# Altium PCB PWR.PcbDoc
Units mm, origin at the board's own origin, x right, y up, seen from the top; angles counter-clockwise.
Board outline 90 x 47 mm, 2 copper layers (Top Layer, Bottom Layer); 44 components, 29 nets, 136 pads, 6 vias.
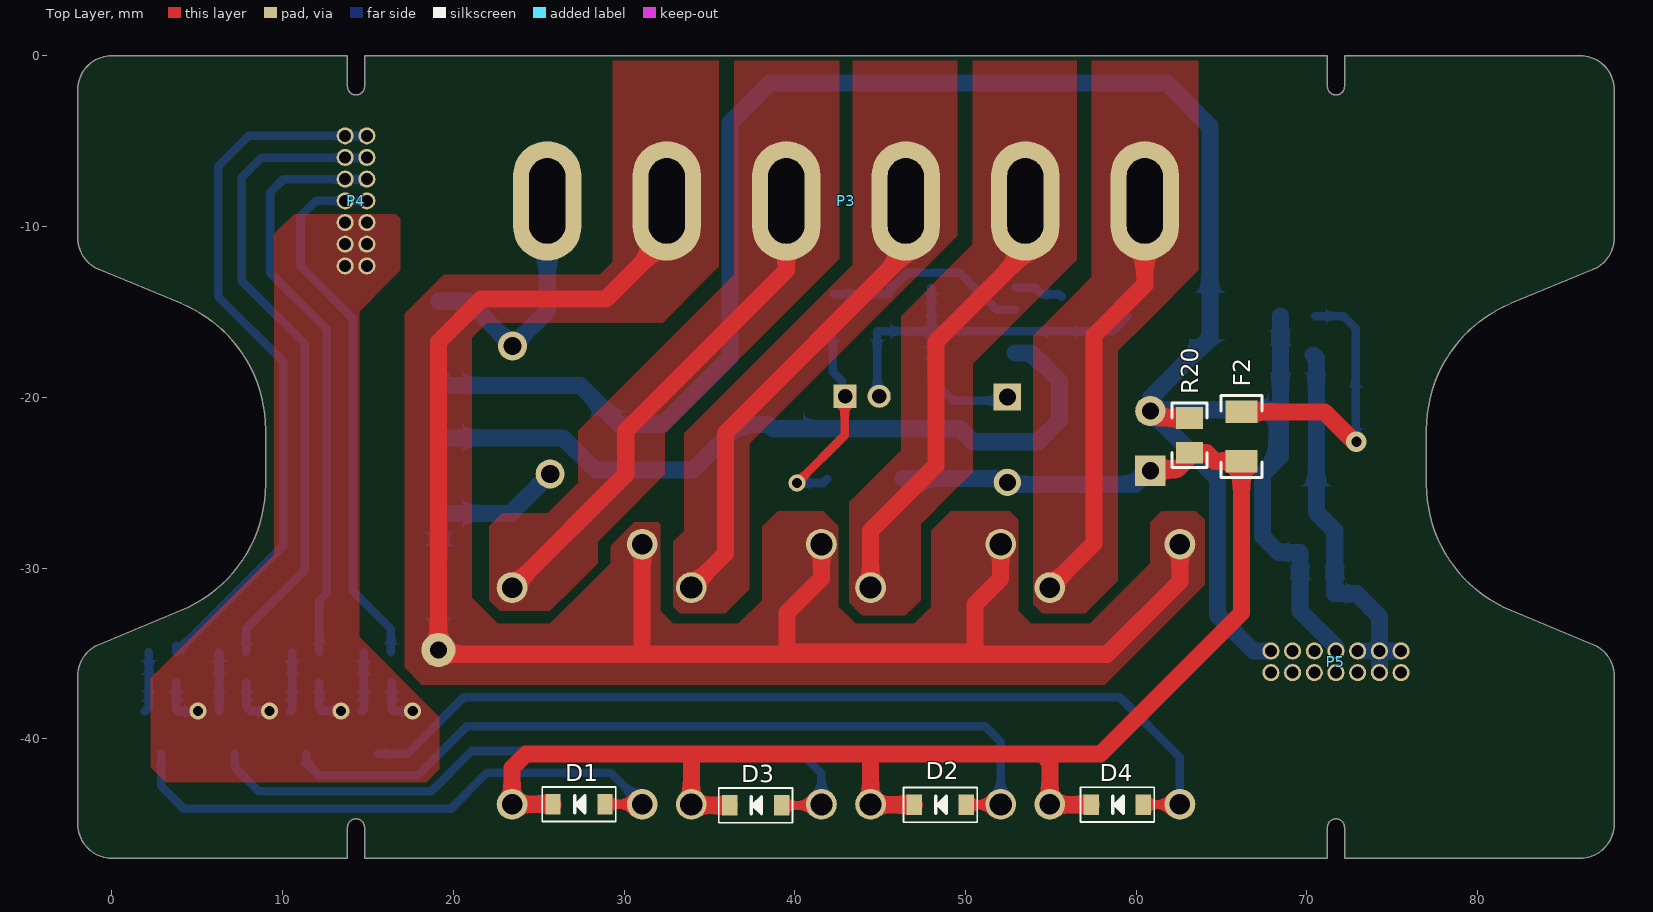
[diagram p0: Top Layer view]
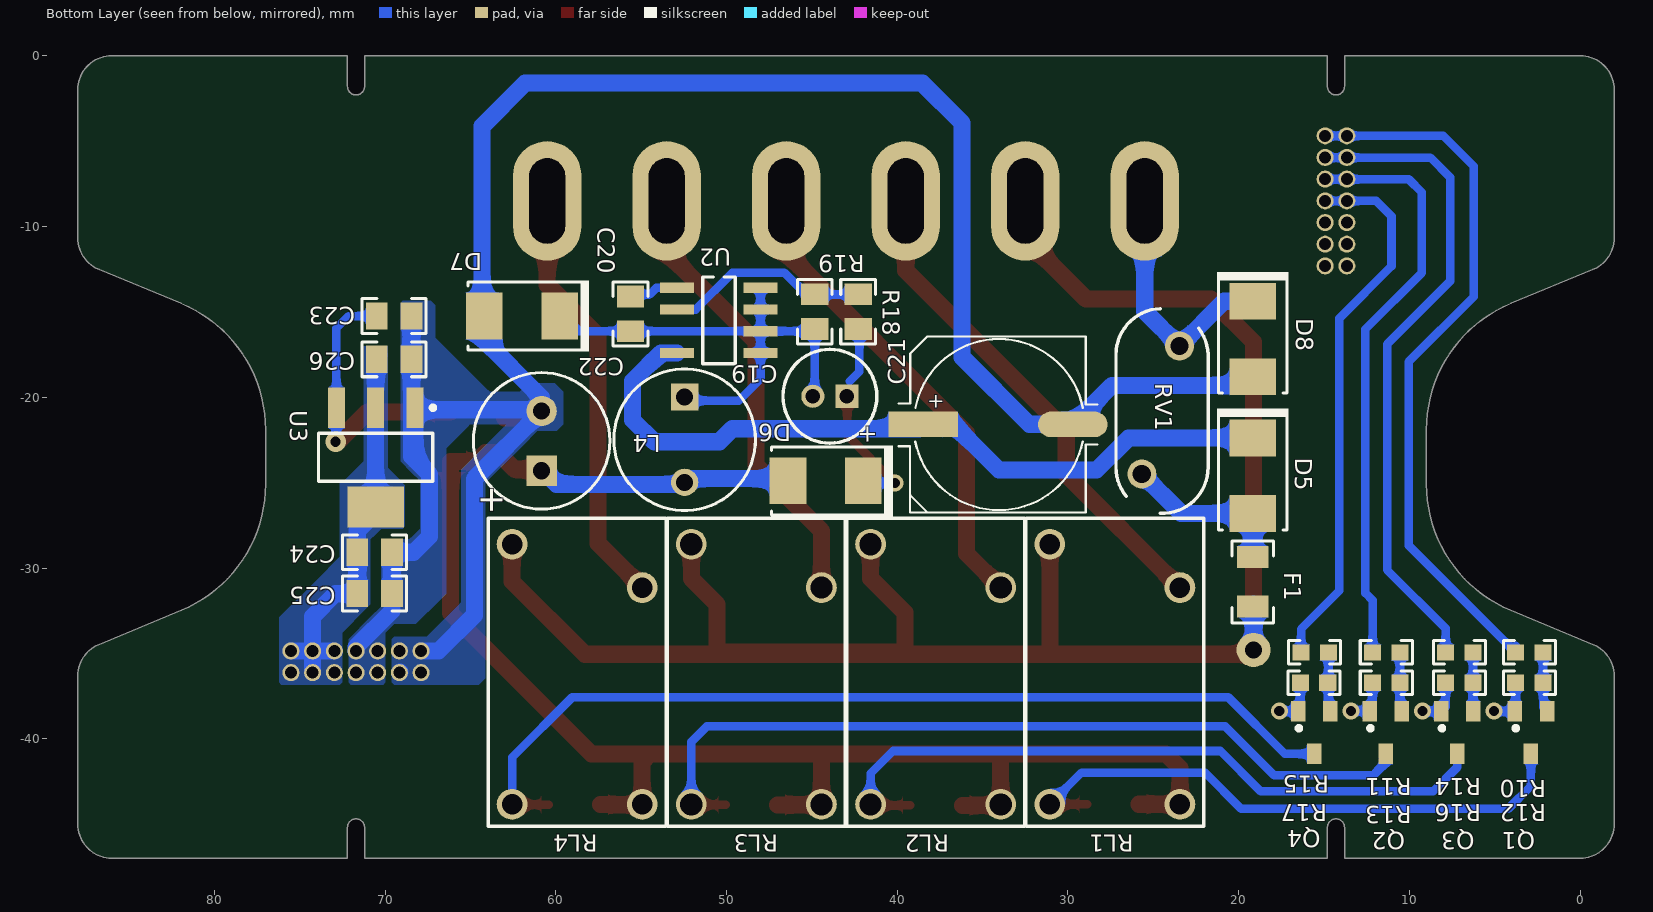
[diagram p1: Bottom Layer view, seen from below]

## Layer stack, top to bottom
Top Solder: solder mask 0.0102, Solder Resist, Dk 3.5
Top Layer: signal copper 0.0356
Dielectric 1: dielectric 0.32, FR-4, Dk 4.8
Bottom Layer: signal copper 0.0356
Bottom Solder: solder mask 0.0102, Solder Resist, Dk 3.5

## Board outline
-2,-44.993 -2,-36.33 cw(c0,-36.33) -0.765,-34.482 4.061,-32.483 ccw(c1,-25.091) 9,-25.091 9,-21.895 ccw(c1,-21.895) 4.061,-14.504 -0.765,-12.505 cw(c0,-10.657) -2,-10.657 -2,-1.993 cw(c0,-1.993) 0,0.007 13.8,0.007 13.8,-1.793 ccw(c14.3,-1.793) 14.8,-1.793 14.8,0.007 71.2,0.007 71.2,-1.793 ccw(c71.7,-1.793) 72.2,-1.793 72.2,0.007 86,0.007 cw(c86,-1.993) 88,-1.993 88,-10.657 cw(c86,-10.657) 86.765,-12.505 81.939,-14.504 ccw(c85,-21.895) 77,-21.895 77,-25.091 ccw(c85,-25.091) 81.939,-32.483 86.765,-34.482 cw(c86,-36.33) 88,-36.33 88,-44.993 cw(c86,-44.993) 86,-46.993 72.2,-46.993 72.2,-45.193 ccw(c71.7,-45.193) 71.2,-45.193 71.2,-46.993 14.8,-46.993 14.8,-45.193 ccw(c14.3,-45.193) 13.8,-45.193 13.8,-46.993 0,-46.993 cw(c0,-44.993)

## Design rules (kind name [scope] priority, off if disabled: settings)
Clearance [All] p1: gap=0.2
ComponentClearance [All] p1 off: gap=0.05 collisioncheckmode=3 verticalgap=0.05 showdistances=FALSE
HoleSize [All] p1: absolutevalues=TRUE maxlimit=10 minlimit=0.025 maxpercent=80.000 minpercent=20.000
MinimumSolderMaskSliver [All] p1: minsoldermaskwidth=0.001
PolygonConnect [All] p1: connectstyle=Direct reliefconductorwidth=0.254 reliefentries=4 polygonreliefangle="90 Angle" airgapwidth=0.254
RoutingVias [All] p1: holewidth=0.711 width=1.27 viastyle="Through Hole" minholewidth=0.3 minwidth=0.3 maxholewidth=5 maxwidth=5
SilkToBoardRegionClearance [All] p1 off:
SilkToSilkClearance [All] p1 off: silktosilkclearance=0.001
SilkToSolderMaskClearance [IsPad] p1 off: minsilkscreentomaskgap=0.01 clearancetoexposedcopper=TRUE
SolderMaskExpansion [All] p1: expansion=0.102
Width [All] p1: maxlimit=2 minlimit=0.2 preferedwidth=0.254
24 further rules are at their usual default settings.

## Components (designator, comment, footprint, x,y, rotation, side; value= is the part's Value field where it differs from the comment)
C19 "ECA-1HHG100" NHG_500x1100 43.942,-19.939 r0 bottom
C20 "104" 0805_HV 55.626,-15.113 r90 bottom
C21 "400AX6R8M8x11" PANACAP-G-GENERIC 34.036,-21.59 r180 bottom
C22 "400AX6R8M8x11" CAPPRD350W60D800H1100 60.826,-22.553 r90 bottom
C23 "105" 0805_HV 69.469,-15.24 r0 bottom
C24 "105" 0805_HV 70.612,-29.083 r0 bottom
C25 "105" 0805_HV 70.612,-31.496 r0 bottom
C26 "105" 0805_HV 69.469,-17.78 r0 bottom
D1 "Diode SMD" DIO-SMD-123 27.36,-43.837 r180 top
D2 "Diode SMD" DIO-SMD-123 48.521,-43.87 r180 top
D3 "Diode SMD" DIO-SMD-123 37.71,-43.903 r180 top
D4 "Diode SMD" DIO-SMD-123 58.893,-43.859 r180 top
D5 "US1M-13-F" SMB 19.177,-24.587 r90 bottom
D6 "US1M-13-F" SMB 44.196,-24.892 r180 bottom
D7 "US1M-13-F" SMB 61.976,-15.24 r180 bottom
D8 "US1M-13-F" SMB 19.177,-16.586 r90 bottom
F1 "Res" 1206 19.177,-30.808 r90 bottom
F2 "Res" 1206 66.167,-22.299 r90 top
L4 "7447480331" IND_WE-TI_8095 52.451,-22.479 r270 bottom
P3 "Header 6" CONWALL_SWITH-4 25.502,-8.5 r0 top locked
P4 "Header 7X2" CON14_1.27 13.665,-4.683 r270 top
P5 "Header 7X2" CON14_1.27 75.51,-34.858 r180 top
Q1 "C1815" SOT23B 2.884,-39.64 r180 bottom
Q2 "C1815" SOT23B 11.393,-39.64 r180 bottom
Q3 "C1815" SOT23B 7.202,-39.64 r180 bottom
Q4 "C1815" SOT23B 15.584,-39.64 r180 bottom
R10 "1K" 0603 2.973,-34.941 r180 bottom
R11 "1K" 0603 11.355,-34.941 r180 bottom
R12 "10K" 0603 2.973,-36.719 r0 bottom
R13 "10K" 0603 11.355,-36.719 r0 bottom
R14 "1K" 0603 7.075,-34.941 r180 bottom
R15 "1K" 0603 15.546,-34.941 r180 bottom
R16 "10K" 0603 7.075,-36.719 r0 bottom
R17 "10K" 0603 15.584,-36.719 r0 bottom
R18 "13k" 0805_HV 42.291,-14.986 r270 bottom
R19 "2K" 0805_HV 44.831,-14.986 r90 bottom
R20 "3k3" 0805_HV 63.119,-22.225 r270 top
RL1 "Component_1" AZ7705#1 31.06,-31.143 r180 bottom locked
RL2 "Component_1" AZ7705#2 41.56,-31.143 r180 bottom
RL3 "Component_1" AZ7705#2 52.06,-31.143 r180 bottom locked
RL4 "Component_1" AZ7705#1 62.56,-31.145 r180 bottom locked
RV1 "S10K275E2" VAR_S10K275E2 24.487,-20.801 r270 bottom
U2 "LNK306" "SOP 7" 52.906,-13.589 r180 bottom
U3 "AMS1117-3.3V SOT223 _MH" SOT223 70.546,-23.513 r0 bottom

## Footprints (in the part's own frame and the unit in brackets; to place one, negate y for a bottom-side part, rotate by r counter-clockwise, add the part's x,y. Pads: shape width x height; smd on the part's side, far side on the other; paste and mask are expansions set on the pad)
0603 [mm] "0603 from SM-752 data"
  rect 1x0.95 smd: 1(-0.8,0) 2(0.8,0)
  silkscreen extent -1.52,-0.69 1.52,0.69, body extent -0.87,-0.47 0.87,0.47, height 1
0805_HV [mil] "0805 with 30mil clearance between pads"
  rect 50x63 smd: 1(-40,0) 2(40,0)
  silkscreen extent -74,-40 74,40, body extent -43,-29 43,29, height 57
1206 [mm] "1206 from SM-752 data"
  rect 1.3x1.85 smd: 1(1.45,0) 2(-1.45,0)
  silkscreen extent -2.4,-1.21 2.4,1.21, body extent -1.7,-0.9 1.7,0.9, height 1.35
AZ7705#1 [mm] "AZ7705"
  round 1.8 hole 1.2: 1(0,-12.7) 2(7.62,-12.7) 3(7.62,0) 4(0,2.54)
  silkscreen extent -1.4,-13.97 9.02,4.06, body extent -1.29,-13.8 8.91,4.4, height 15
AZ7705#2 [mm] "AZ7705"
  round 1.8 hole 1.3: 1(0,-12.7) 2(7.62,-12.7) 3(7.62,0) 4(0,2.54)
  silkscreen extent -1.4,-13.97 9.02,4.06, body extent -1.29,-13.8 8.91,4.4, height 15
CAPPRD350W60D800H1100 [mm] "Capacitor, Alum, 8x11mm"
  rect 1.78x1.78 hole 1: 1(-1.75,0)
  round 1.78 hole 1: 2(1.75,0)
  silkscreen extent -4,-4 4,4, body extent -4.02,-4.03 4.03,4.02, height 11.79
CON14_1.27 [mm]
  round 1 hole 0.7: 1(0,0) 2(0,1.27) 3(1.27,0) 4(1.27,1.27) 5(2.54,0) 6(2.54,1.27) 7(3.81,0) 8(3.81,1.27) 9(5.08,0) 10(5.08,1.27) 11(6.35,0) 12(6.35,1.27) 13(7.62,0) 14(7.62,1.27)
CONWALL_SWITH-4 [mm]
  oval 4x7 hole 2.1 slot 5 at 90 deg: 1(0,0) 2(7,0) 3(14,0) 4(21,0) 5(28,0) 6(35,0)
DIO-SMD-123 [mm]
  rect 0.9x1.2 smd: 1(-1.524,0) 2(1.524,0)
  silkscreen extent -2.16,-1.02 2.16,1.02, body extent -1.94,-0.8 1.76,0.8, height 1.25
IND_WE-TI_8095 [mm] "Wurth WE-TI 8095"
  rect 1.6x1.6 hole 1: 1(-2.5,0)
  round 1.6 hole 1: 2(2.5,0)
  silkscreen extent -4.15,-4.15 4.15,4.15, body extent -4.15,-4.15 4.15,4.15, height 10
NHG_500x1100 [mm] "TH, 2-Leads, Dia 5mm,  Lead Spacing 2mm"
  rect 1.35x1.35 hole 0.85: 1(-1,0)
  round 1.35 hole 0.85: 2(1,0)
  silkscreen extent -2.75,-2.75 2.75,2.75, body extent -2.75,-2.75 2.75,2.75, height 12.51
PANACAP-G-GENERIC [mil]
  rect 160x59.06 smd: 1(-175,0)
  oval 160x59.06 smd: 2(170,0)
  silkscreen extent -231,-203 227,203, body extent -233,-203 223,203, height 402
SMB [mm] "Molded Diode, 2-Leads, Body 5.4x3.6mm, IPC Medium Density, based on OnSemi component dimensions"
  rect 2.159x2.743 smd: 1(2.21,0) 2(-2.21,0)
  silkscreen extent -3.17,-2.08 3.94,2.08, body extent -2.7,-1.8 2.7,1.8, height 2.32
"SOP 7" [mm]
  rect 2x0.6 smd: 1(0,0) 2(0,-1.27) 4(0,-3.81) 5(4.9,-3.81) 6(4.9,-2.54) 7(4.9,-1.27) 8(4.9,0)
  silkscreen extent 1.52,-4.45 3.43,0.63
SOT23B [mm] "SOT 23B"
  rect 0.85x1.2 smd: 1(0.95,1.25) 2(0,-1.25) 3(-0.94,1.245)
  silkscreen extent -1.02,0.13 -0.77,0.38, body extent -1.5,-1.2 1.5,1.3, height 1.06
SOT223 [mm]
  rect 1x2.4 smd: 1(-2.3,-2.9) 2(0,-2.9) 3(2.3,-2.9)
  rect 3.3x2.4 smd: 4(0,2.9)
  silkscreen extent -3.47,-3.02 3.35,1.4, body extent -3.25,-3.56 3.25,3.4, height 1.68
VAR_S10K275E2 [mm] "EPCOS"
  round 1.7 hole 1.067: 1(-3.81,1.016) 2(3.69,-1.184)
  silkscreen extent -6,-2.7 6,2.7, body extent -6.02,-2.7 5.98,2.7, height 15

## Part data
C19: "CAP, AL, 10 µF, 50 V, +/- 20%, TH"
C20 C23 C24 C25 C26: library part CM, "Cap SMD"
C21 C22: "CAP, AL, 6.8uF, 400V, +/-20%, TH"
D1 D2 D3 D4: "Default Diode"
D5 D6 D7 D8: library part MURS160-13-F, "Diode, Ultrafast, 600V, 1A, SMB"
F1 F2: library part Res-SMD, "Resistor"
L4: "Inductor, Wirewound, Ferrite, 330 µH, 1.4 A, 0.3 ohm, TH"
P3: "Header, 6-Pin"
P4 P5: "Header, 7-Pin, Dual row"
Q1 Q2 Q3 Q4: "NPN 600mW, ECB"
R10 R11 R12 R13 R14 R15 R16 R17 R18 R19 R20: library part R, "Resistor 1/4W"
RV1: "Varistor 275V RMS 10MM Radial, TH"
U2: library part Component_1

## Free pads (board coordinates)
  round 2 hole 1: 0(19.126,-34.798)

## Via types
v1: diameter 1, hole 0.6, Top Layer to Bottom Layer, 5 vias
v2: diameter 1.2, hole 0.6, Top Layer to Bottom Layer, 1 vias

## Nets (pads, with @x,y where several pads share a name; then routed paths per layer and width w, separated by ;. In a path a pad name is that pad's centre, name@x,y a point inside that pad or via, vN(x,y) a via of type N, cw(c..) or ccw(c..) an arc to the next point about the centre after c; other vN are vias at no path point)
BP: C20.2 U2.1 | length 2.9
  Bottom Layer w0.5: U2.1 54.102,-13.589 54.483,-13.97 55.499,-13.97 C20.2
FB: R18.1 R19.2 U2.2 | length 12
  Bottom Layer w0.5: R18.1 45.339,-13.97 46.609,-12.7 49.657,-12.7 51.816,-14.859 U2.2
GND: C21.2 C22.2 C23.1 C24.1 C25.1 C26.1 D7.2 D8.2 P5.7 P5.8 P5.9 P5.10 P5.11 P5.12 P5.13 P5.14 R20.1 U3.1 | length 134.3
  Top Layer w1: C22.2@60.833,-20.729 61.313,-21.209 R20.1@62.992,-21.209
  Bottom Layer w1: D8.2 19.685,-19.304 27.432,-19.304 C21.2 32.258,-21.59 36.195,-17.653 36.195,-3.937 38.529,-1.603 61.794,-1.603 64.312,-4.121 64.312,-16.544 60.833,-20.022 60.833,-20.837 64.77,-24.774 64.77,-32.766 66.862,-34.858 P5.13 ; C22.2@61.403,-20.729 68.13,-20.729 U3.1 68.246,-23.677 ; C23.1 C26.1 68.453,-23.47 68.246,-23.677 ; P5.12@69.131,-36.099 P5.12 ; P5.7 71.7,-34.616 69.596,-32.512 C25.1 C24.1 68.326,-29.083 67.395,-28.152 67.395,-24.528 68.246,-23.677
GND_RL: P4.9 P4.10 P4.11 P4.12 P4.13 P4.14 Q1.3 Q2.3 Q3.3 Q4.3 R12.2 R13.2 R16.2 R17.2 | length 11.5
  Bottom Layer w0.5: R12.2 3.773,-38.344 Q1.3 5.018,-38.395 v1(5.043,-38.37) ; R16.2 7.875,-38.128 Q3.3 9.209,-38.395 v1(9.234,-38.37) ; R13.2 12.155,-38.217 Q2.3 12.359,-38.37 v1(13.425,-38.37) ; R17.2 16.384,-38.255 Q4.3 17.591,-38.395 v1(17.616,-38.37)
L: F1.2 P3.2 pad.0 RL1.4 RL2.4 RL3.4 RL4.4 | length 117.6
  Top Layer w1: pad.0 19.126,-16.764 21.636,-14.254 28.926,-14.254 32.502,-10.678 P3.2 ; pad.0@19.431,-35.052 30.734,-35.052 ; RL1.4 31.06,-34.726 30.734,-35.052 ; RL2.4 41.56,-30.601 39.548,-32.614 39.548,-34.925 50.546,-34.925 50.546,-32.131 52.06,-30.617 RL3.4 ; RL4.4 62.56,-30.785 58.293,-35.052 30.734,-35.052
  Bottom Layer w1: pad.0 F1.2@19.126,-32.108
L1: P3.3 RL1.3 | length 29.3
  Top Layer w1: RL1.3 23.467,-31.143 30.099,-24.511 30.099,-21.971 39.502,-12.568 P3.3
L2: P3.4 RL2.3 | length 27.8
  Top Layer w1: RL2.3 35.941,-29.142 35.941,-22.098 46.502,-11.537 P3.4
L3: P3.5 RL3.3 | length 26.4
  Top Layer w1: RL3.3 44.44,-27.823 48.26,-24.003 48.26,-16.764 53.502,-11.522 P3.5
L4: P3.6 RL4.3 | length 24.9
  Top Layer w1: RL4.3 57.531,-28.554 57.531,-16.383 60.502,-13.412 P3.6
MCU_VCC: C24.2 C25.2 C26.2 P5.1 P5.2 P5.3 P5.4 P5.5 P5.6 U3.2 U3.4 | length 23.5
  Bottom Layer w1: C26.2@70.358,-17.526 70.546,-17.714 U3.2 U3.4 70.546,-26.731 71.628,-27.813 C24.2 C25.2 72.898,-31.496 74.24,-32.838 P5.3 ; P5.5 P5.3 ; P5.4 P5.3 ; P5.1 P5.3
N: D8.1 P3.1 RV1.1 | length 14.7
  Bottom Layer w1: D8.1 20.856,-14.376 RV1.1 25.502,-14.96 P3.1
NetC19_1: C19.1 D6.1 R18.2 | length 11.1
  Top Layer w0.5: v1(40.132,-25.019) 42.926,-22.225 42.926,-20.05 C19.1@42.688,-19.812
  Bottom Layer w0.5: v1(40.132,-25.019) 41.656,-25.019 D6.1@41.91,-24.765 ; R18.2@42.215,-16.561 42.215,-18.491 42.774,-19.05
NetC23_2: C23.2 F2.1 U3.3 | length 16.8
  Top Layer w1: F2.1 71.014,-20.849 72.771,-22.606 v2(72.898,-22.606)
  Bottom Layer w0.5: C23.2 72.136,-15.24 72.846,-15.95 U3.3 72.846,-22.554 v2(72.898,-22.606)
NetD1_1: D1.1 Q1.2 RL1.1 | length 34.4
  Top Layer w0.5: D1.1 31.054,-43.837 RL1.1
  Bottom Layer w0.5: Q1.2 2.884,-42.765 4.214,-44.095 19.855,-44.095 21.966,-41.984 29.201,-41.984 RL1.1
NetD2_1: D2.1 Q2.2 RL3.1 | length 48.7
  Top Layer w0.5: D2.1 52.033,-43.87 RL3.1
  Bottom Layer w0.5: Q2.2 11.393,-41.418 12.109,-42.133 17.928,-42.133 20.784,-39.277 51.155,-39.277 52.06,-40.182 RL3.1
NetD3_1: D3.1 Q3.2 RL2.1 | length 41.4
  Top Layer w0.5: D3.1 41.5,-43.903 RL2.1
  Bottom Layer w0.5: Q3.2 7.202,-41.672 8.616,-43.086 18.704,-43.086 21.072,-40.718 40.242,-40.718 41.56,-42.036 RL2.1
NetD4_1: D4.1 Q4.2 RL4.1 | length 54.7
  Top Layer w0.5: D4.1 62.546,-43.859 RL4.1
  Bottom Layer w0.5: Q4.2 17.295,-40.89 20.611,-37.574 59.037,-37.574 62.56,-41.097 RL4.1 ; RL4.1@62.537,-43.868 RL4.1@62.56,-43.891
NetD5_2: D5.2 F1.1 RV1.2 | length 10
  Bottom Layer w1: F1.1 D5.2 23.365,-26.797 RV1.2
NetQ1_1: Q1.1 R10.2 R12.1 | length 3.5
  Bottom Layer w0.5: Q1.1 2.173,-38.151 R12.1 R10.2
NetQ2_1: Q2.1 R11.2 R13.1 | length 3.5
  Bottom Layer w0.5: Q2.1 10.555,-38.278 R13.1 R11.2
NetQ3_1: Q3.1 R14.2 R16.1 | length 3.5
  Bottom Layer w0.5: Q3.1 6.275,-38.367 R14.2
NetQ4_1: Q4.1 R15.2 R17.1 | length 3.5
  Bottom Layer w0.5: Q4.1 14.746,-38.278 R15.2
RL1C: P4.1 P4.2 R10.1 | length 42.5
  Bottom Layer w0.5: R10.1@3.773,-34.56 R10.1 10.033,-28.681 10.033,-17.907 6.223,-14.097 6.223,-6.477 8.01,-4.69 P4.2@14.935,-4.69
RL2C: P4.3 P4.4 R14.1 | length 38.6
  Bottom Layer w0.5: R14.1 7.875,-33.539 11.303,-30.111 11.303,-16.891 7.62,-13.208 7.62,-7.112 8.772,-5.96 P4.4@14.935,-5.96
RL3C: P4.5 P4.6 R11.1 | length 34.5
  Bottom Layer w0.5: R11.1 12.155,-31.884 12.573,-31.466 12.573,-16.002 9.271,-12.7 9.271,-8.001 10.042,-7.23 P4.6@14.935,-7.23
RL4C: P4.7 P4.8 R15.1 | length 32
  Bottom Layer w0.5: P4.8@14.935,-8.5 11.947,-8.5 11.049,-9.398 11.049,-12.319 14.097,-15.367 14.097,-31.325 16.346,-33.574 R15.1
S: C19.2 C20.1 D7.1 L4.1 R19.1 U2.5 U2.6 U2.7 U2.8 | length 29.2
  Bottom Layer w0.5: C19.2@44.815,-19.939 44.831,-19.923 44.831,-16.129 U2.6 ; U2.8 U2.7 U2.6 ; L4.1@52.451,-20.193 49.276,-20.193 48.006,-18.923 U2.5 U2.6 ; D7.1@59.512,-15.24 58.623,-16.129 C20.1 U2.6
VCC_RELAY: C22.1 D1.2 D2.2 D3.2 D4.2 D6.2 F2.2 L4.2 R20.2 RL1.2 RL2.2 RL3.2 RL4.2 | length 97.5
  Top Layer w1: D1.2 23.446,-43.837 RL1.2 23.44,-41.711 24.257,-40.894 33.782,-40.894 ; D3.2 34,-43.903 RL2.2 33.94,-41.052 33.782,-40.894 ; D2.2 44.467,-43.87 RL3.2 44.44,-41.158 44.704,-40.894 ; D4.2 54.954,-43.859 RL4.2 54.94,-41.351 54.483,-40.894 ; C22.1@60.833,-24.229 62.385,-24.229 63.119,-23.495 R20.2 64.107,-23.241 64.615,-23.749 F2.2 66.167,-32.639 57.912,-40.894 54.483,-40.894 ; 33.782,-40.894 44.704,-40.894 ; 44.704,-40.894 54.483,-40.894
  Bottom Layer w1: D6.2@46.33,-24.765 52.023,-24.765 52.358,-25.1 59.962,-25.1 C22.1@60.833,-24.229
VIN1: C21.1 D5.1 U2.4 | length 44.7
  Bottom Layer w1: D5.1 26.441,-22.377 28.321,-24.257 34.036,-24.257 36.703,-21.59 C21.1 38.735,-21.844 49.657,-21.844 50.419,-22.606 54.229,-22.606 55.499,-21.336 55.499,-19.05 53.848,-17.399 U2.4

## Polygon pours and split planes (outlines as drawn)
MCU_VCC on Bottom Layer "Bottom Layer-No Net" (solid, remove dead copper, pour order 6): 69.85,-17.018 69.85,-24.13 69.088,-24.892 68.834,-25.146 68.834,-26.289 68.834,-27.559 68.961,-27.686 69.469,-27.686 70.231,-27.686 70.612,-28.067 70.866,-28.321 70.866,-29.337 70.866,-32.131 71.12,-32.385 72.517,-33.782 72.517,-35.941 72.517,-36.703 72.644,-36.83 73.025,-36.83 76.073,-36.83 76.2,-36.703 76.2,-32.893 74.041,-30.734 72.644,-29.337 72.644,-24.892 72.39,-24.892 71.628,-24.13 71.247,-23.749 71.247,-21.336 71.247,-17.018
GND on Bottom Layer "Bottom Layer-No Net" (solid, remove dead copper, pour order 4): 61.043,-19.812 61.17,-19.685 62.865,-19.685 63.881,-19.685 64.135,-19.431 67.056,-16.51 67.056,-14.986 67.056,-14.605 67.31,-14.351 67.818,-14.351 68.961,-14.351 69.088,-14.478 69.088,-14.859 69.088,-23.749 68.453,-24.384 67.945,-24.892 67.945,-26.924 67.945,-27.686 68.326,-28.067 68.58,-28.321 69.469,-28.321 69.977,-28.321 70.231,-28.702 70.231,-28.829 70.231,-32.258 70.866,-32.893 72.136,-34.163 72.136,-35.56 72.136,-36.703 72.009,-36.83 71.628,-36.83 70.104,-36.83 69.977,-36.703 69.977,-35.941 69.977,-33.782 69.596,-33.401 69.469,-33.274 68.453,-33.274 68.199,-33.274 66.802,-31.877 66.421,-31.496 66.421,-28.067 66.421,-22.987 65.151,-21.717 65.024,-21.59 63.627,-21.59 60.579,-21.59 60.452,-21.463
GND on Bottom Layer "Bottom Layer-No Net" (solid, remove dead copper, pour order 2): 59.563,-19.685 59.563,-21.209 59.563,-21.59 59.817,-21.844 59.944,-21.971 60.96,-21.971 61.087,-21.971 61.976,-22.86 64.135,-25.019 64.135,-29.21 64.135,-36.449 64.516,-36.83 69.215,-36.83 69.469,-36.83 69.596,-36.703 69.596,-35.941 69.596,-34.163 69.469,-34.036 68.961,-34.036 67.564,-34.036 66.421,-32.893 65.532,-32.004 65.532,-24.638 65.532,-24.257 63.246,-21.971 62.103,-20.828 62.103,-19.939 62.103,-19.685 61.722,-19.304 61.595,-19.177 60.071,-19.177
GND_RL on Top Layer "Bottom Layer-No Net" (solid, remove dead copper, pour order 24): 16.002,-9.271 13.97,-9.271 10.668,-9.271 9.906,-10.033 9.525,-10.414 9.525,-18.669 9.525,-29.21 5.334,-33.401 2.286,-36.449 2.286,-40.64 2.286,-41.656 3.048,-42.418 3.175,-42.545 10.16,-42.545 18.415,-42.545 19.05,-41.91 19.177,-41.783 19.177,-38.989 19.177,-38.735 18.542,-38.1 14.478,-34.036 14.478,-15.875 14.478,-14.986 16.256,-13.208 16.891,-12.573 16.891,-9.652 16.891,-9.525 16.637,-9.271
L on Top Layer "Bottom Layer-No Net" (solid, remove dead copper, pour order 22): 30.607,-27.305 32.004,-27.305 32.131,-27.432 32.131,-27.559 32.131,-32.512 32.639,-33.02 33.02,-33.401 33.02,-35.052 32.512,-34.544 29.21,-34.544 29.21,-31.242 29.591,-30.861 30.353,-30.099 30.353,-28.575
L on Top Layer "Bottom Layer-No Net" (solid, remove dead copper, pour order 18): 31.75,-27.305 30.607,-27.305 29.21,-28.702 29.21,-29.464 29.21,-29.718 28.829,-30.099 24.892,-34.036 24.892,-34.798 31.496,-34.798 31.623,-34.925 31.877,-34.671 33.909,-34.671 33.909,-34.163 33.782,-34.036 33.02,-33.274 32.512,-33.274 32.131,-33.274 31.75,-32.893 31.75,-29.591 31.75,-27.305
L4 on Top Layer "Bottom Layer-No Net" (solid, remove dead copper, pour order 16): 57.4,0.007 57.404,0.003 57.404,-8.128 57.404,-12.954 56.007,-14.351 53.975,-16.383 53.975,-22.86 53.975,-32.131 54.356,-32.512 54.483,-32.639 55.499,-32.639 57.023,-32.639 57.785,-31.877 58.928,-30.734 58.928,-24.257 58.928,-17.272 60.579,-15.621 63.627,-12.573 63.627,-2.54 63.627,-0.02 63.6,0.007
L3 on Top Layer "Bottom Layer-No Net" (solid, remove dead copper, pour order 14): 50.4,0.007 50.419,-0.012 50.419,-9.144 50.419,-11.049 49.276,-12.192 46.228,-15.24 46.228,-20.447 46.228,-23.114 43.815,-25.527 43.18,-26.162 43.18,-28.829 43.18,-32.004 43.815,-32.639 43.942,-32.766 45.085,-32.766 46.482,-32.766 46.99,-32.258 47.371,-31.877 47.371,-29.464 47.371,-27.432 49.149,-25.654 50.419,-24.384 50.419,-19.177 50.419,-18.034 51.943,-16.51 56.515,-11.938 56.515,-5.969 56.515,-0.078 56.6,0.007
L2 on Top Layer "Bottom Layer-No Net" (solid, remove dead copper, pour order 12): 43.4,0.007 43.4,-12.226 42.164,-13.462 33.528,-22.098 33.528,-24.511 33.528,-27.813 32.893,-28.448 32.893,-30.48 32.893,-32.258 33.274,-32.639 34.417,-32.639 35.941,-32.639 36.83,-31.75 37.338,-31.242 37.338,-28.829 37.338,-22.733 41.529,-18.542 49.53,-10.541 49.53,-3.937 49.53,-0.063 49.6,0.007
L1 on Top Layer "Bottom Layer-No Net" (solid, remove dead copper, pour order 10): 36.4,0.007 36.449,-0.042 36.449,-4.191 36.449,-12.827 35.687,-13.589 27.305,-21.971 27.305,-24.384 27.305,-25.019 26.289,-26.035 25.527,-26.797 23.368,-26.797 22.86,-26.797 22.225,-27.432 22.098,-27.559 22.098,-28.829 22.098,-31.877 22.606,-32.385 22.733,-32.512 23.749,-32.512 25.654,-32.512 27.051,-31.115 28.448,-29.718 28.448,-29.337 28.448,-28.448 29.591,-27.305 32.385,-24.511 32.385,-22.225 32.385,-22.098 34.671,-19.812 42.6,-11.883 42.6,0.007
L on Top Layer "Bottom Layer-No Net" (solid, remove dead copper, pour order 8): 29.4,0.007 29.337,-0.056 29.337,-1.27 29.337,-12.065 28.702,-12.7 28.575,-12.827 26.924,-12.827 19.431,-12.827 17.399,-14.859 17.145,-15.113 17.145,-22.987 17.145,-35.814 18.161,-36.83 18.923,-36.83 58.166,-36.83 63.5,-31.496 64.008,-30.988 64.008,-27.432 64.008,-27.178 63.5,-26.67 62.611,-26.67 61.468,-26.67 61.214,-26.924 60.833,-27.305 60.833,-28.321 60.833,-29.718 57.785,-32.766 57.277,-33.274 55.753,-33.274 53.848,-33.274 53.34,-32.766 53.086,-32.512 53.086,-30.988 53.086,-27.178 52.578,-26.67 51.181,-26.67 49.149,-26.67 48.387,-27.432 48.006,-27.813 48.006,-29.464 48.006,-32.258 46.99,-33.274 45.593,-33.274 43.561,-33.274 42.799,-32.512 42.545,-32.258 42.545,-30.226 42.545,-27.559 41.656,-26.67 40.894,-26.67 38.989,-26.67 38.354,-27.305 38.1,-27.559 38.1,-28.575 38.1,-31.877 36.703,-33.274 35.433,-33.274 22.606,-33.274 21.336,-32.004 21.082,-31.75 21.082,-28.575 21.082,-16.51 21.717,-15.875 21.971,-15.621 22.606,-15.621 32.258,-15.621 34.671,-13.208 35.56,-12.319 35.56,-3.937 35.56,-0.033 35.6,0.007

## Silkscreen, mask and mechanical layers (free items; w line width, h text height)
Top Solder:
  lines w1: 23.622,-30.988 30.099,-24.511 30.099,-21.59 39.624,-12.065 39.624,-8.255 39.624,-10.922 ; 30.226,-34.798 30.226,-29.464 30.988,-28.702 30.988,-28.448 ; 32.639,-11.43 32.639,-9.144 ; 32.766,-8.001 32.766,-12.446 30.988,-14.224 20.828,-14.224 19.177,-15.875 19.177,-34.747 19.126,-34.798 40.005,-34.798 ; 33.94,-31.143 35.306,-29.777 35.306,-29.591 35.306,-22.352 46.609,-11.049 46.609,-7.747 ; 41.56,-28.603 40.005,-30.158 40.005,-34.798 ; 44.45,-31.369 45.466,-30.353 45.466,-26.67 48.26,-23.876 48.26,-16.383 53.594,-11.049 53.594,-7.62 ; 50.292,-34.798 57.912,-34.798 62.56,-30.15 62.56,-28.605 ; 52.06,-28.603 50.673,-29.99 50.673,-34.798 40.005,-34.798 ; 54.94,-31.145 54.961,-31.145 56.515,-29.591 56.515,-16.637 60.502,-12.65 60.502,-8.5
Mechanical 2:
  circle w0.006: c88,-2 r0.003
  circle w0.006: c-2,-2 r0.003
  circle w0.006: c-2,9.526 r0.003
  circle w0.006: c86,0 r0.003
  circle w0.006: c86,-49 r0.003
  circle w0.006: c96.171,-49 r0.003
  lines w0.1: 2,-46.993 6,-46.993 ; 2,0.007 6,0.007 ; 21.6,0.007 22.4,0.007 ; 28.6,0.007 29.4,0.007 ; 33,-46.993 34,-46.993 ; 35.6,0.007 36.4,0.007 ; 42.6,0.007 43.4,0.007 ; 49.6,0.007 50.4,0.007 ; 52,-46.993 53,-46.993 ; 56.6,0.007 57.4,0.007 ; 63.6,0.007 64.4,0.007 ; 80,-46.993 84,-46.993 ; 80,0.007 84,0.007 ; -2,-44.993 ccw(c0,-44.993) 0,-46.993 13.8,-46.993 13.8,-45.193 cw(c14.3,-45.193) 14.8,-45.193 14.8,-46.993 71.2,-46.993 71.2,-45.193 cw(c71.7,-45.193) 72.2,-45.193 72.2,-46.993 86,-46.993 ccw(c86,-44.993) 88,-44.993 88,-36.33 ccw(c86,-36.33) 86.765,-34.482 81.939,-32.483 cw(c85,-25.091) 77,-25.091 77,-21.895 cw(c85,-21.895) 81.939,-14.504 86.765,-12.505 ccw(c86,-10.657) 88,-10.657 88,-1.993 ccw(c86,-1.993) 86,0.007 72.2,0.007 72.2,-1.793 cw(c71.7,-1.793) 71.2,-1.793 71.2,0.007 14.8,0.007 14.8,-1.793 cw(c14.3,-1.793) 13.8,-1.793 13.8,0.007 0,0.007 ccw(c0,-1.993) -2,-1.993 -2,-10.657 ccw(c0,-10.657) -0.765,-12.505 4.061,-14.504 cw(c1,-21.895) 9,-21.895 9,-25.091 cw(c1,-25.091) 4.061,-32.483 -0.765,-34.482 ccw(c0,-36.33) -2,-36.33 -2,-44.993
Mechanical 3:
  drawing of 206 lines, arcs and shapes, not listed

## Text inside footprints (layer, text, board x,y; h text height)
C19: Bottom Overlay "+" at 41.148,-21.717 h1.02 r180; Mechanical 5 "+" at 40.142,-19.539 h1.02 r180
C21: Bottom Overlay "+" at 38.236,-20.615 h0.89
C22: Bottom Overlay "+" at 63.112,-26.871 h1.5 r270; Mechanical 5 "+" at 60.826,-28.053 h1.5 r270